# EAGLE board breakouts (EAGLE 6.5.0)
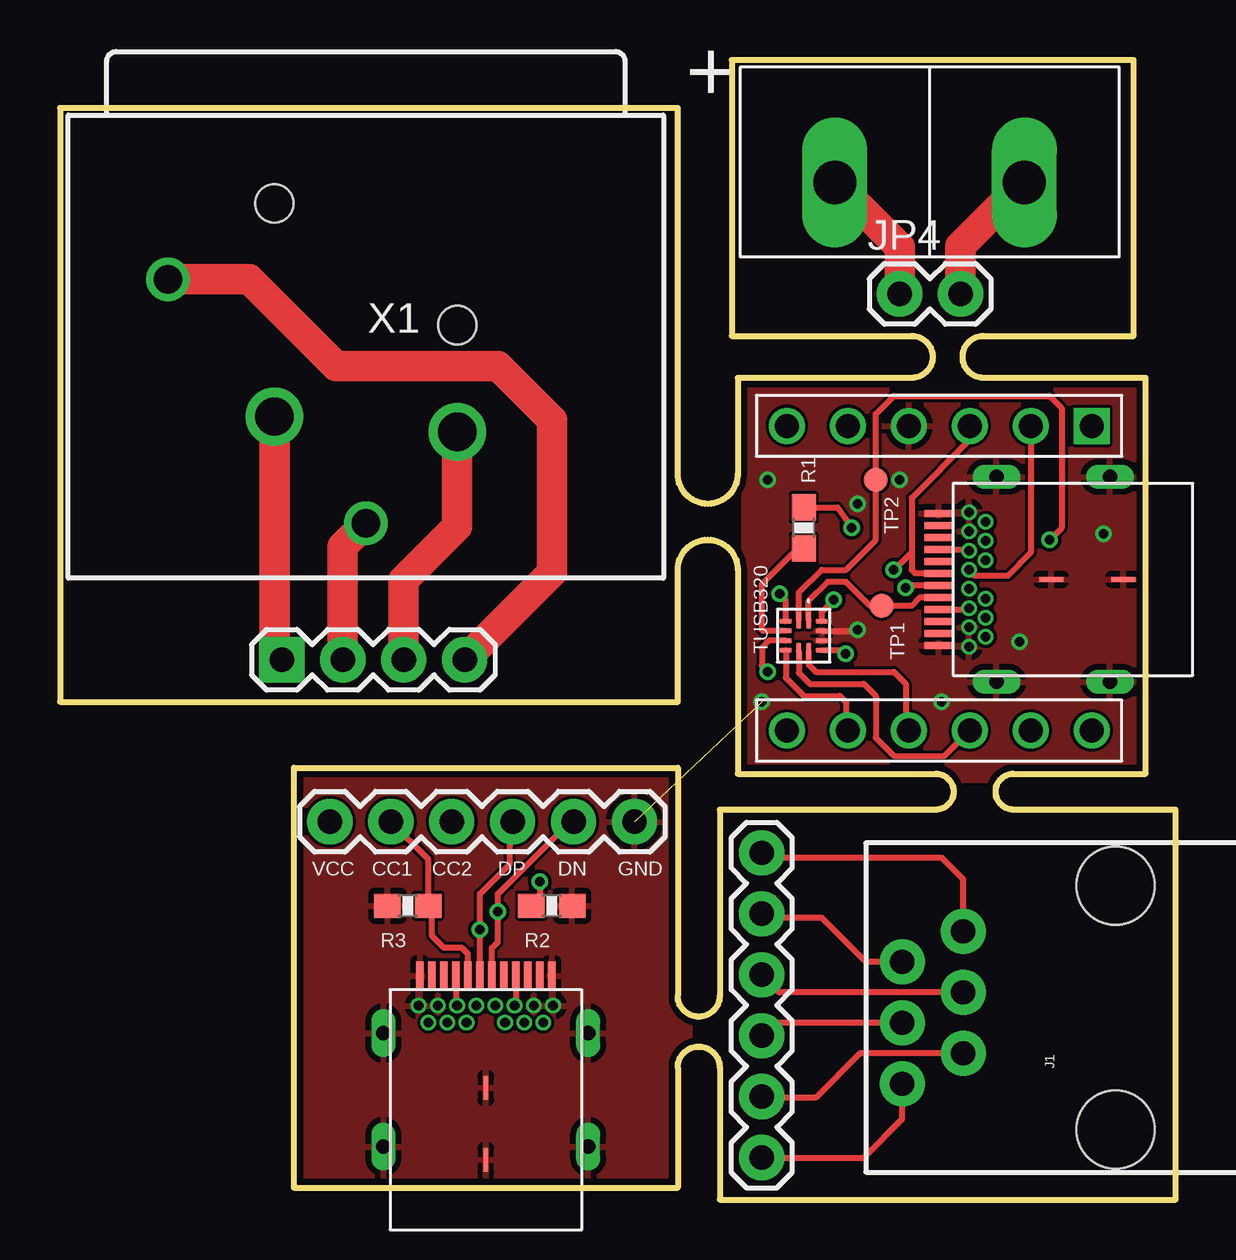
[diagram p0: board, top side]
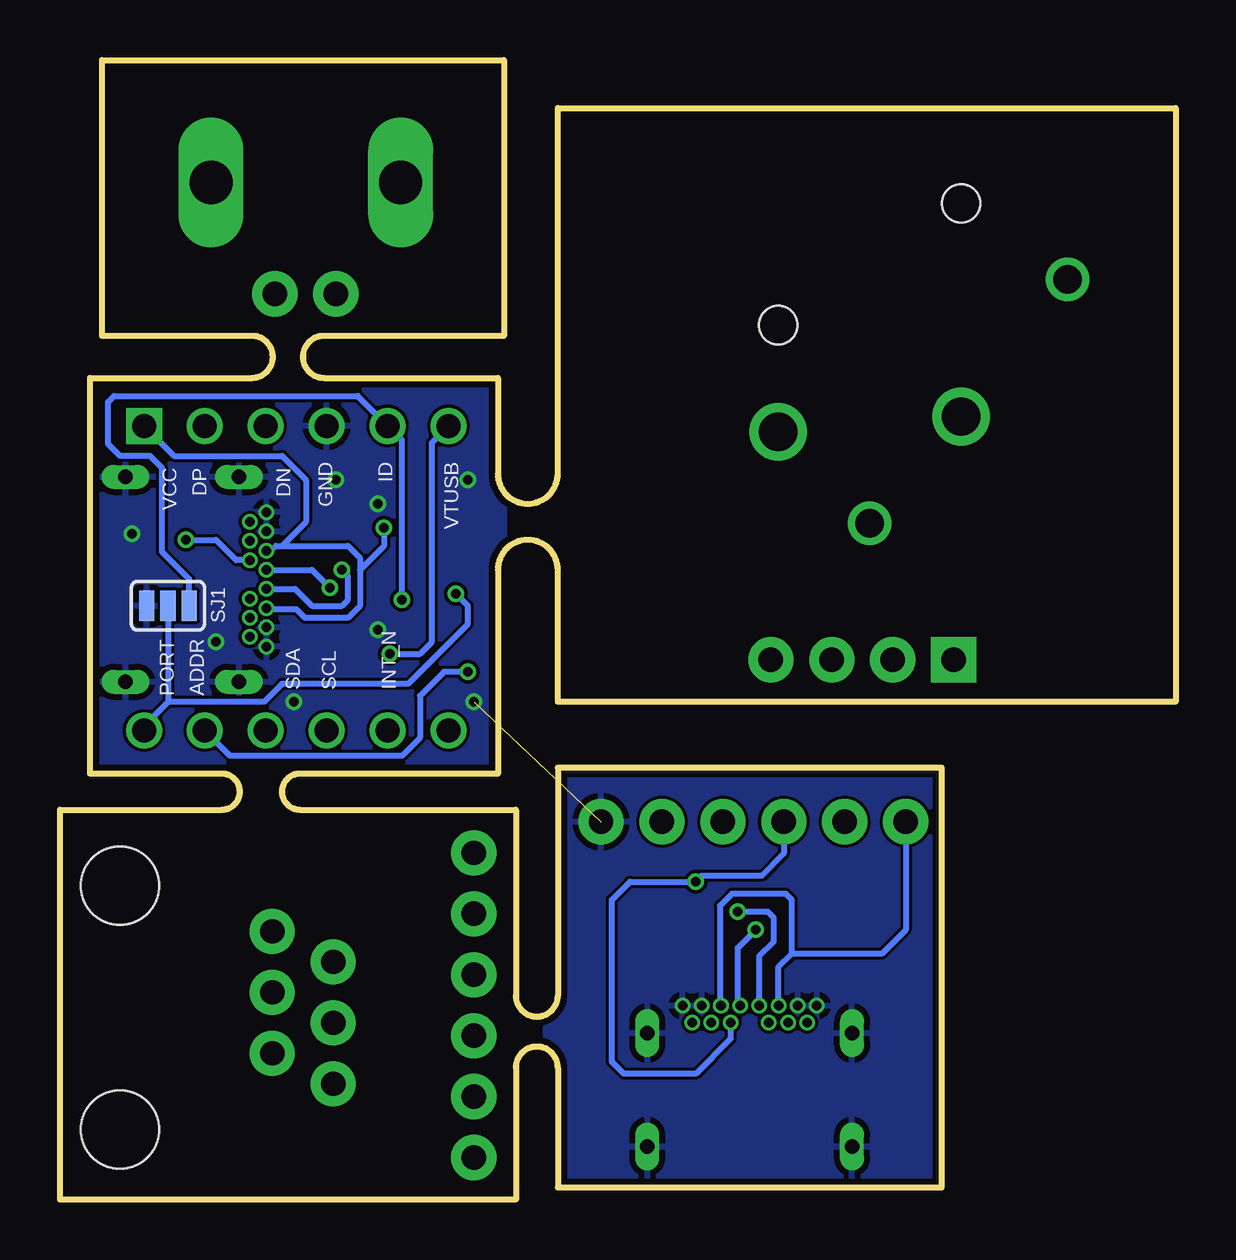
[diagram p1: board, bottom side, seen from below]

Size 46.5 x 47.5 mm. Coordinates in mm from the lower left corner, seen from the top.
Outline: 9.75,0.5 25.75,0.5 25.75,5.5 arc-180 27.5,5.5 27.5,0 46.5,0 46.5,16.25 39.75,16.25 arc-180 39.75,17.75 45.25,17.75 45.25,34.25 38.5,34.25 arc-180 38.5,36 44.75,36 44.75,47.5 28,47.5 28,36 35.5,36 arc-180 35.5,34.25 28.25,34.25 28.25,30.25 arc-180 25.75,30.25 25.75,45.5 0,45.5 0,20.75 25.75,20.75 25.75,26.25 arc-180 28.25,26.25 28.25,17.75 36.5,17.75 arc-180 36.5,16.25 27.5,16.25 27.5,8.5 arc-180 25.75,8.5 25.75,18 9.75,18 9.75,0.5
Copper layers (1*16): Top 0.035mm / dielectric 1.5mm / Bottom 0.035mm
Design rules "dirt_cheap_dirty_boards.v1 *": minimum track width 5mil, minimum drill 12mil, track to track 5mil, track to pad 5mil, pad to pad 5mil, via to via 5mil, smd to smd 0mil, copper to edge 10mil, drill to drill 10mil, minimum pad ring 4mil, minimum via ring 6mil, stop-mask expansion 2mil, vias tented up to drill 25mil, thermal gap 10mil

## Footprints (pad centres in the part's own frame; a part is rotated, then mirrored left to right if it is on the bottom)
USB-C_WURTH_632723X00011 = smd 0.3 x 1.2: A1 -2.75,10.58; A2 -2.25,10.58; A3 -1.75,10.58; A4 -1.25,10.58; A5 -0.75,10.58; A6 -0.25,10.58; A7 0.25,10.58; A8 0.75,10.58; A9 1.25,10.58; A10 1.75,10.58; A11 2.25,10.58; A12 2.75,10.58 | drill 0.4 pad 0.65: B1 2.8,9.33; B2 2.4,8.63; B3 1.6,8.63; B4 1.2,9.33; B5 0.8,8.63; B6 0.4,9.33; B7 -0.4,9.33; B8 -0.8,8.63; B9 -1.2,9.33; B10 -1.6,8.63; B11 -2.4,8.63; B12 -2.8,9.33; GND1 2,9.33; GND2 -2,9.33 | drill 0.6 pad 1 long: CON1 4.27,8.18; CON2 4.27,3.45; CON3 -4.27,3.45; CON4 -4.27,8.18 | smd 0.2 x 1: GND3 0,2.9; GND4 0,5.9
RJ11-6 = drill 1.016 pad 1.88: 1 -3.175,8.89; 2 -1.905,6.35; 3 -0.635,8.89; 4 0.635,6.35; 5 1.905,8.89; 6 3.175,6.35 | hole 3.251: -5.08,0; 5.08,0
POWERPOLE_PAIR_25A = drill 1.8 long: BLACK 3.95,-0.85; RED -3.95,-0.85
1X06 = drill 1.016 pad 1.88: 1 0,0; 2 2.54,0; 3 5.08,0; 4 7.62,0; 5 10.16,0; 6 12.7,0
1X04 = drill 1.016 pad 1.88 square: 1 0,0 | drill 1.016 pad 1.88: 2 2.54,0; 3 5.08,0; 4 7.62,0
1X02 = drill 1.016 pad 1.88: 1 0,0; 2 2.54,0
0603-RES = smd 1.1 x 1: 1 -0.85,0; 2 0.85,0
SJ_3 = smd 0.635 x 1.27: 1 -0.889,0; 2 0,0; 3 0.889,0
TP10R = smd 1 x 1: TP 0,0
X2QFN = smd 0.7 x 0.2: P$1 -0.65,0.2; P$2 -0.65,-0.2; P$7 0.65,-0.2; P$8 0.65,0.2 | smd 0.2 x 0.5: P$3 -0.6,-0.75; P$4 -0.2,-0.75; P$5 0.2,-0.75; P$6 0.6,-0.75; P$9 0.6,0.75; P$10 0.2,0.75; P$11 -0.2,0.75; P$12 -0.6,0.75
DIP12_6WIDE = drill 1 square: P$1 0,0 | drill 1: P$2 0,-2.54; P$3 0,-5.08; P$4 0,-7.62; P$5 0,-10.16; P$6 0,-12.7; P$7 12.7,-12.7; P$8 12.7,-10.16; P$9 12.7,-7.62; P$10 12.7,-5.08; P$11 12.7,-2.54; P$12 12.7,0
NC3FAH2-0 = drill 1.6: 1 -3.81,0.635; 2 3.81,0 | drill 1.2: 3 0,-3.815; G -8.25,6.355 | hole 1.6: -3.81,9.525; 3.81,4.445

## Placement (x,y rotation side)
CONN1  USB-C_WURTH_632723X00011USB-C  [USB-C_WURTH_632723X00011]  47.22,25.85 90 top
CONN2  USB-C_WURTH_632723X00011USB-C  [USB-C_WURTH_632723X00011]  17.75,-1.25 0 top
J1  RJ11  [RJ11-6]  44,8 90 top
J2  POWERPOLE_POWER25A  [POWERPOLE_PAIR_25A]  36.25,43.25 0 top
JP1  [1X06]  11.25,15.75 0 top
JP2  [1X06]  29.25,1.75 90 top
JP3  [1X04]  9.25,22.5 0 top
JP4  M02PTH  [1X02]  35,37.75 0 top
R1  900K  [0603-RES]  31,28 270 top
R2  5K1  [0603-RES]  20.5,12.25 180 top
R3  5K1  [0603-RES]  14.5,12.25 0 top
SJ1  [SJ_3]  42,24.75 180 bottom
TP1  PTR1TP10R  [TP10R]  34.25,24.75 90 top
TP2  PTR1TP10R  [TP10R]  34,30 90 top
U$1  TUSB320XQFN  [X2QFN]  31,23.5 270 top
U$2  USBC_BREAKOUTPDIP  [DIP12_6WIDE]  43,32.25 270 top
X1  NC3FAH2-0  [NC3FAH2-0]  12.75,32 0 top

## Library data of the parts
CONN1 CONN2 U$1 U$2 = USB-C
J1 = SparkFun-Connectors; PROD_ID: CONN-08590
J2 = powerpoles
JP1 JP2 SJ1 = SparkFun
JP3 JP4 = SparkFun-Connectors
R1-R3 = SparkFun-Passives
TP1 TP2 = testpad
X1 = con-neutrik_ag; MPN: NC3FAH-2-0; OC_FARNELL: unknown; OC_NEWARK: 11J5829

## Nets
ADDR: U$1.P$5 U$2.P$11
CC1: CONN1.A5 TP1.TP U$1.P$1
CC1_SA: CONN2.A5 JP1.2 R3.2
CC2: CONN1.B5 TP2.TP U$1.P$2
CC2_SA: CONN2.B5 JP1.3 R2.2
DN: CONN1.A7 CONN1.B7 U$2.P$3
DN_SA: CONN2.A7 CONN2.B7 JP1.5
DP: CONN1.A6 CONN1.B6 U$2.P$2
DP_SA: CONN2.A6 CONN2.B6 JP1.4
GND: CONN1.A1 CONN1.A12 CONN1.B1 CONN1.B12 CONN1.CON1 CONN1.CON2 CONN1.CON3 CONN1.CON4 CONN1.GND1 CONN1.GND2 CONN1.GND3 CONN1.GND4 CONN2.A1 CONN2.A12 CONN2.B1 CONN2.B12 CONN2.CON1 CONN2.CON2 CONN2.CON3 CONN2.CON4 CONN2.GND1 CONN2.GND2 CONN2.GND3 CONN2.GND4 JP1.6 R2.1 R3.1 SJ1.3 U$1.P$10 U$1.P$11 U$2.P$4
ID: U$1.P$9 U$2.P$6
INT_N: U$1.P$6 U$2.P$8
N$1: J1.1 JP2.1
N$2: J1.2 JP2.2
N$3: J1.3 JP2.3
N$4: J1.4 JP2.4
N$5: J1.5 JP2.5
N$6: J1.6 JP2.6
N$7: JP3.1 X1.1
N$8: JP3.2 X1.3
N$9: R1.2 U$1.P$4
N$10: JP3.3 X1.2
N$11: JP3.4 X1.G
N$12: J2.RED JP4.1
N$13: J2.BLACK JP4.2
PORT: SJ1.2 U$1.P$3 U$2.P$12
SCL: U$1.P$8 U$2.P$9
SDA: U$1.P$7 U$2.P$10
VBUS_SA: CONN2.A4 CONN2.A9 CONN2.B4 CONN2.B9 JP1.1
VIO: SJ1.1 U$1.P$12 U$2.P$5
VUSB: CONN1.A4 CONN1.A9 CONN1.B4 CONN1.B9 R1.1 U$2.P$1

## Tracks (layer width: path | path; a pad name or v marks a point on that pad's centre or on a via)
ADDR  (via drill 0.4)
  Top 0.254: U$1.P$5 29.55,23.3 29.25,23 29.25,22.25 v29.5,22
  Bottom 0.254: v29.5,22 30.5,22 31.5,21 31.5,19.25 32.25,18.5 39.41,18.5 U$2.P$11
CC1
  Top 0.254: CONN1.A5 35.85,25.1 35.5,24.75 TP1.TP 33.75,24.75 32.75,25.75 32,25.75 31.2,24.95 U$1.P$1
CC1_SA
  Top 0.254: JP1.2 15.35,14.19 R3.2 15.5,12.1 15.5,11 16,10.5 16.75,10.5 17,10.25 CONN2.A5
CC2  (via drill 0.4)
  Top 0.254: U$1.P$2 30.8,25.3 31.75,26.25 32.75,26.25 34,27.5 TP2.TP 34,32.75 34.75,33.5 41.25,33.5 41.75,33 41.75,28 v41.25,27.5
  Bottom 0.254: v41.25,27.5 40,27.5 39.15,26.65 CONN1.B5
CC2_SA  (via drill 0.4)
  Top 0.254: v20,13.25 20,12.6 R2.2
  Bottom 0.254: JP1.3 16.33,14.42 17.25,13.5 19.75,13.5 v20,13.25 22.75,13.25 23.5,12.5 23.5,5.75 23,5.25 20,5.25 18.55,6.7 CONN2.B5
DN  (via drill 0.4)
  Top 0.254: U$2.P$3 37.92,31.67 35.5,29.25 35.5,27 | 35.5,27 35.5,26.25 35.65,26.1 CONN1.A7 | v34.75,26.25 35.5,27
  Bottom 0.254: CONN1.B7 36.7,25.45 36,24.75 34.75,24.75 34.5,25 34.5,26 v34.75,26.25
DN_SA  (via drill 0.4)
  Top 0.254: JP1.5 21.25,15.75 18.25,12.75 v18.25,12 18.25,10.75 18,10.5 CONN2.A7
  Bottom 0.254: CONN2.B7 17.35,10.15 16.75,10.75 16.75,11.75 17,12 v18.25,12
DP  (via drill 0.4)
  Top 0.254: U$2.P$2 40.46,26.96 39.5,26 38.14,26 CONN1.B6 | CONN1.A6 35.35,25.6 v35.25,25.5
  Bottom 0.254: CONN1.B6 36,26.25 v35.25,25.5
DP_SA  (via drill 0.4)
  Top 0.254: CONN2.A6 v17.5,11.25 17.5,12.75 18.75,14 18.75,15.63 JP1.4
  Bottom 0.254: CONN2.B6 18.25,8.18 18.25,10.5 v17.5,11.25
GND  (via drill 0.4)  (1 unrouted)
  Top 0.254: U$1.P$11 33.2,23.7 v33.25,23.75
  other vias: 33.25,29 29.5,30 35,30 40,23.25 43.5,27.75 36.75,20.75 29.25,20.75
  pour Top: 28.5,17.5 46,17.5 46,34.5 28.5,34.5
  pour Bottom: 28,17.5 45.75,17.5 45.75,34.5 28,34.5
  pour Top: 8.75,18.75 8.75,0 26.25,0 26.25,18.75
  pour Bottom: 8.75,18.75 8.75,0 26.25,0 26.25,18.75
ID  (via drill 0.4)
  Top 0.254: U$1.P$9 32.6,22.9 v32.75,22.75
  Bottom 0.254: v32.75,22.75 31.5,22.75 31,23.25 31,31.55 U$2.P$6
INT_N
  Top 0.254: U$2.P$8 32.75,19.64 32.75,20.75 32.5,21 31,21 30.25,21.75 U$1.P$6
N$1
  Top 0.254: JP2.1 33.5,1.75 35.11,3.36 J1.1
N$2
  Top 0.254: J1.2 33.34,6.09 31.5,4.25 29.29,4.25 JP2.2
N$3
  Top 0.254: J1.3 29.78,7.37 JP2.3
N$4
  Top 0.254: J1.4 29.98,8.63 JP2.4
N$5
  Top 0.254: J1.5 33.59,9.9 31.75,11.75 29.41,11.75 JP2.5
N$6
  Top 0.254: J1.6 37.65,13.35 36.75,14.25 29.45,14.25 JP2.6
N$7
  Top 1.27: X1.1 8.94,22.81 JP3.1
N$8
  Top 1.27: JP3.2 11.79,27.23 X1.3
N$9
  Top 0.254: U$1.P$4 29.3,23.7 29.25,23.75 29.25,25.65 30.5,26.9 R1.2
N$10
  Top 1.27: X1.2 16.56,28.06 14.33,25.83 JP3.3
N$11
  Top 1.27: JP3.4 20.5,26.13 20.5,32.5 18.25,34.75 11.5,34.75 7.89,38.35 X1.G
N$12
  Top 1.27: J2.RED 35,39.7 JP4.1
N$13
  Top 1.27: J2.BLACK 37.54,39.74 JP4.2
PORT  (via drill 0.4)
  Top 0.254: U$1.P$3 30.25,25 v30,25.25
  Bottom 0.254: U$2.P$12 43,19.75 42,20.75 | SJ1.2 42,20.75 | v30,25.25 29.5,24.75 29.5,24 32,21.5 37.25,21.5 38,20.75 42,20.75
SCL
  Top 0.254: U$1.P$8 31.2,22.3 31.5,22 34.75,22 35.25,21.5 35.25,19.68 U$2.P$9
SDA
  Top 0.254: U$1.P$7 30.8,21.95 31.25,21.5 33.5,21.5 34,21 34,19.25 34.75,18.5 36.87,18.5 U$2.P$10
VBUS_SA
  Top 0.254: CONN2.A4 16.5,8.13 CONN2.B9 | CONN2.A9 19,8.13 CONN2.B4
  Bottom 0.254: CONN2.B9 16.55,9.7 16,10.25 | 16,10.25 16,12.5 16.25,12.75 18.5,12.75 19,12.25 19,8.13 CONN2.B4 | JP1.1 11.25,11.25 12.25,10.25 16,10.25
VIO  (via drill 0.4)
  Top 0.254: U$1.P$12 31.75,24.5 v32.25,25
  Bottom 0.254: v32.25,25 32.25,31.66 U$2.P$5 34.09,33.5 44.25,33.5 44.5,33.25 44.5,31.5 44,31 42.75,31 42.25,30.5 42.25,27 41.11,25.86 SJ1.1 41.11,24.61
VUSB  (via drill 0.4)
  Top 0.254: CONN1.A4 37.84,24.6 CONN1.B9 | CONN1.A9 37.84,27.1 CONN1.B4 | R1.1 32.4,28.85 v33,28
  Bottom 0.254: CONN1.B4 37.7,27.05 37.5,27.25 37.25,27.25 | 37.25,27.25 34.5,27.25 34,26.75 34,26.25 | 34,26.25 34,24.75 34.5,24.25 36.29,24.25 CONN1.A4 37.84,24.6 CONN1.B9 | U$2.P$1 41.75,31 37.25,31 36.25,30 36.25,28.25 37.25,27.25 | v33,28 33,27.25 34,26.25

## Text on the board
tNames: TUSB320 | VCC | CC1 | CC2 | DP | DN | GND
bNames: VTUSB | ID | GND | DN | DP | VCC | INT_N | SCL | SDA | ADDR | PORT